# EAGLE board q1 110120062 qn 1 (EAGLE 7.6.0)

Size 56.82 x 53.33 mm. Coordinates in mm from the lower left corner, seen from the top.
Outline: 0,0 56.82,0 56.82,53.33 0,53.33 0,0
Copper layers (1*16): Top 0.035mm / dielectric 1.5mm / Bottom 0.035mm
Design rules "default": minimum track width 10mil, minimum drill 24mil, track to track 8mil, track to pad 8mil, pad to pad 8mil, via to via 8mil, smd to smd 8mil, copper to edge 40mil, drill to drill 8mil, minimum pad ring 10mil, minimum via ring 8mil, stop-mask expansion 4mil, vias tented up to drill 0mil, thermal gap 10mil

## Footprints (pad centres in the part's own frame; a part is rotated, then mirrored left to right if it is on the bottom)
DC-POWER = drill 0.889 pad 2.54 octagon: + 0,2.54; - 0,-2.54
LED5MM = drill 0.813 octagon: A -1.27,0; K 1.27,0
2P-2.54-65/35MIL = drill 0.889 pad 1.651 square: 1 0,1.27 | drill 0.889 pad 1.651: 2 0,-1.27
0207/10 = drill 0.813 octagon: 1 -5.08,0; 2 5.08,0
M251 = drill 0.813 long: 1 -2.54,0; 2 0,0; 3 2.54,0
TO92 = drill 0.813 octagon: 1 1.27,0; 2 0,1.905; 3 -1.27,0

## Placement (x,y rotation side)
BAT1  [DC-POWER]  5,10.08 0 top
BAT2  [DC-POWER]  5,22.78 0 top
D1  [LED5MM]  5,86.28 0 top  (outside the outline)
D2  [LED5MM]  5,124.38 0 top  (outside the outline)
M1  [2P-2.54-65/35MIL]  5,162.48 0 top  (outside the outline)
R1  1k‎Ω  [0207/10]  5,111.68 0 top  (outside the outline)
R2  1k‎Ω  [0207/10]  5,137.08 0 top  (outside the outline)
R3  1k‎Ω  [0207/10]  5,149.78 0 top  (outside the outline)
R4  1k‎Ω  [0207/10]  5,35.48 0 top
S1  [M251]  5,48.18 0 top
S2  [M251]  5,60.88 0 top  (outside the outline)
T1  [TO92]  5,73.58 0 top  (outside the outline)
T2  [TO92]  5,98.98 0 top  (outside the outline)

## Library data of the parts
BAT1 BAT2 D1 D2 M1 R1-R4 S1 S2 T1 T2 = AUTODESK_CIRCUITS_BREADBOARD

## Nets
N$1: BAT1.+ T1.3 T2.3
N$2: R4.2 T1.1
N$3: D1.A R4.1
N$4: R1.1 T2.1
N$5: D2.A R1.2
N$6: R2.2 T1.2
N$7: R2.1 S2.1
N$8: R3.2 T2.2
N$9: R3.1 S2.3
N$10: D2.K S1.1
N$11: M1.2 S1.2
N$12: BAT2.- D1.K M1.1
N$13: BAT1.- BAT2.+ S2.2

## Tracks (layer width: path | path; a pad name or v marks a point on that pad's centre or on a via)
N$1  (2 unrouted)
N$2  (1 unrouted)
N$3  (1 unrouted)
N$4  (1 unrouted)
N$5  (1 unrouted)
N$6  (1 unrouted)
N$7  (1 unrouted)
N$8  (1 unrouted)
N$9  (1 unrouted)
N$10  (1 unrouted)
N$11  (1 unrouted)
N$12  (2 unrouted)
N$13  (2 unrouted)